# Altium PCB H0ARAx.PcbDoc (part 2 of 2)
Units mil, origin at the board's own origin, x right, y up, seen from the top; angles counter-clockwise.
Board outline 1363.78 x 1181.1 mil, 2 copper layers (Top Layer, Bottom Layer); 43 components, 29 nets, 117 pads, 20 vias.
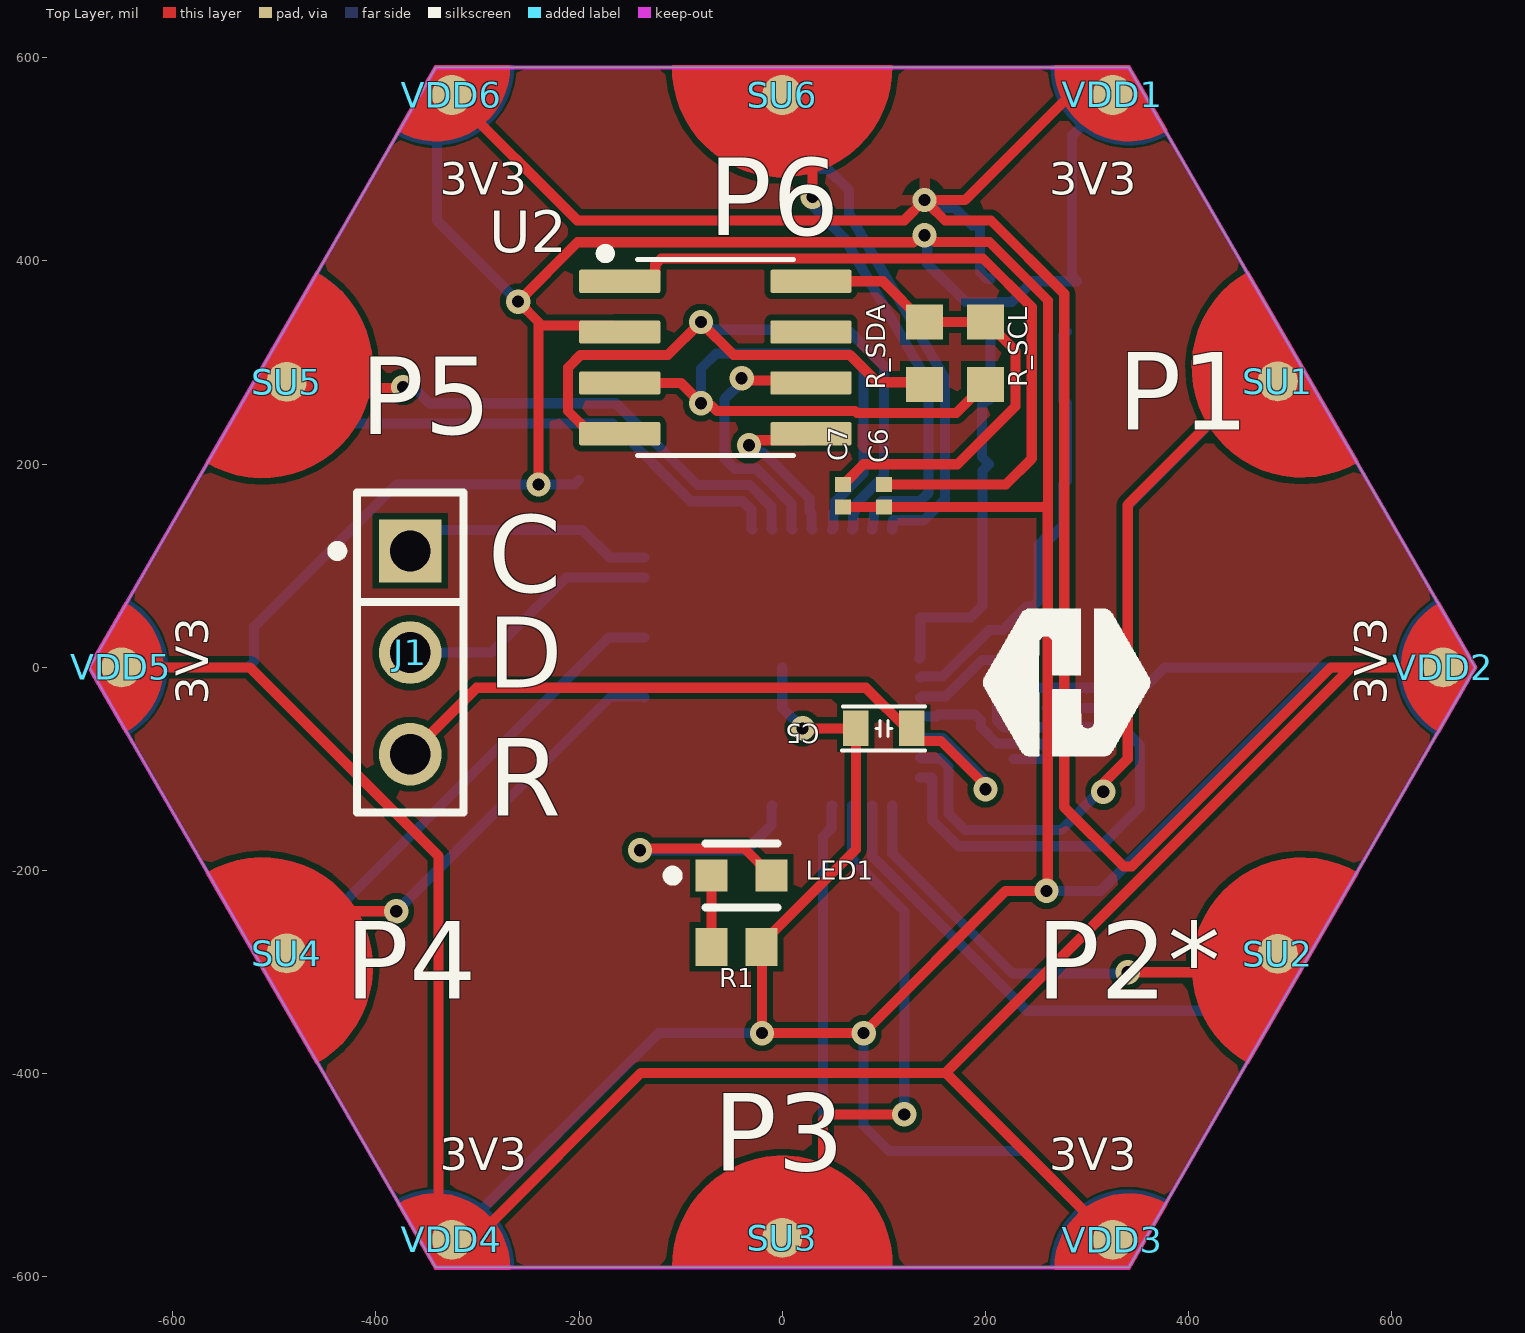
[diagram p0: Top Layer view]

## Via types
v1: diameter 24, hole 12, Top Layer to Bottom Layer, 19 vias
v2: diameter 24, hole 12, Top Layer to Bottom Layer, tented both sides, 1 vias

## Nets (pads, with @x,y where several pads share a name; then routed paths per layer and width w, separated by ;. In a path a pad name is that pad's centre, name@x,y a point inside that pad or via, vN(x,y) a via of type N, cw(c..) or ccw(c..) an arc to the next point about the centre after c; other vN are vias at no path point) (continued)
GND: (continued)
  Bottom Layer w10: GND5.Pwr_D -525.86,0 -520,5.86 -520,40 -380,180 -204.61,180 R2.2 ; GND4.Pwr_D -121.81,-360 v1(-20,-360) ; GND6.Pwr_D -325.2,557.65 -340,542.85 -340,440 v1(-260,360) ; U1.49 0,-40 v2(20,-60) ; v1(80,-360) 80,-450.91 105.09,-476 237.81,-476 GND3.Pwr_D ; v1(140,425.42) 142.68,422.74 142.68,397.32 180.25,359.75 226.05,359.75 246.3,380 290.16,380 285.28,384.88 D1.1 285.28,523.47 GND1.Pwr_D ; v1(260,-220) 313.54,-220 533.54,0 ; X1.P$2 336.77,-40 376.77,0 533.54,0 ; GND2.Pwr_D 533.54,0
NetC6_2: C6.2 U2.1 | length 745.6
  Top Layer w10: U2.1 -131.46,380 -125.04,386.42 -125.04,396.56 -119.18,402.42 197.58,402.42 245.49,354.51 245.49,205.49 220,180 C6.2
NetC7_2: C7.2 R_SCL.2 R_SDA.2 U2.8 | length 485.9
  Top Layer w10: U2.8 98.82,380 138.82,340 201.18,340 229.49,311.69 229.49,257.09 172.41,200 80,200 62.87,182.87 62.87,182.48 60.39,180 C7.2
NetLED1_1: LED1.1 R1.2 | length 70
  Top Layer w10: R1.2 -69.53,-274.92 LED1.1
NetLED1_2: LED1.2 U1.19 | length 300.6
  Top Layer w10: v1(-140,-180) -138.25,-178.25 -37.22,-178.25 LED1.2
  Bottom Layer w10: v1(-140,-180) -35.51,-180 -10.75,-155.24 -10.75,-136.73 U1.19
NetR_SCL_1: R_SCL.1 U1.45 U2.3 | length 761.8
  Top Layer w10: U2.3 -100,280 -77.32,257.32 -69.28,257.32 -64.37,252.42 71.7,252.42 73.66,250.46 171.29,250.46 186.69,265.86 186.69,266.46 198.82,278.58 R_SCL.1
  Bottom Layer w10: v1(-80,260) -80,294.14 -65.14,309 65.14,309 80,294.14 80,191.01 51.99,163 51.99,153.42 50.12,151.54 50.12,136.73 U1.45
NetR_SDA_1: R_SDA.1 U1.46 U2.4 | length 869.4
  Top Layer w10: U2.4 -188.54,230 -210.96,252.42 -210.96,294.97 -198.35,307.58 -112.42,307.58 -80.22,339.78 -48.02,307.58 66.54,307.58 93.43,280.69 137.89,280.69 R_SDA.1
  Bottom Layer w10: v1(-80,340) -76.21,340 -68.56,332.35 64.42,332.35 100,296.77 100,188.38 71.68,160.06 71.68,153.42 69.8,151.54 69.8,136.73 U1.46
NetU1_8: U1.8 X1.P$3 | length 120.2
  Bottom Layer w10: U1.8 135.83,-29.74 136.44,-30.36 138.17,-28.62 160.93,-28.62 196.79,7.24 X1.P$3@240,7.24
NetU1_9: U1.9 X1.P$1 | length 176.8
  Bottom Layer w10: U1.9 136.73,-48.31 151.54,-48.31 153.42,-46.43 189.74,-46.43 195.6,-52.29 195.6,-59.06 211.41,-74.88 254.87,-74.88 X1.P$1@260,-80 ; X1.P$1@227.6,-90.12 257.12,-90.12 X1.P$1
NetU1_43: U1.43 U2.6 | length 266.1
  Top Layer w10: v1(-40,284.58) -37.71,282.29 25.9,282.29 U2.6
  Bottom Layer w10: v1(-40,284.58) -40,280.79 -57,263.79 -57,205.74 -46.82,195.56 -25.5,195.56 -13.94,184 8.94,161.13 8.94,136.73 U1.43
NetU1_44: U1.44 U2.5 | length 178.3
  Top Layer w10: v1(-32.8,218.56) -29.01,218.56 -23.99,223.58 21.77,223.58 U2.5
  Bottom Layer w10: v1(-32.8,218.56) -29.01,218.56 -22.01,211.56 -18.87,211.56 26.75,165.94 26.75,153.42 28.62,151.54 28.62,136.73 U1.44
NRST: C5.2 J1.3 U1.10 | length 725.4
  Top Layer w10: J1.3 -300.73,-20 82.2,-20 124.88,-62.68 C5.2@126.77,-62.68 ; C5.2@127.56,-64.92 135.16,-72.52 156.22,-72.52 200,-116.3 v1(200,-120)
  Bottom Layer w10: U1.10 136.73,-69.8 158.18,-69.8 200,-111.62 v1(200,-120)
UART1_RX: SD4.UART_D U1.32 | length 480.8
  Bottom Layer w10: SD4.UART_D -481.5,-281.5 -170.47,29.53 U1.32
UART1_TX: SU4.UART_U U1.29 | length 457.1
  Top Layer w10: SU4.UART_U -446.3,-240 v1(-380,-240)
  Bottom Layer w10: v1(-380,-240) -168.62,-28.62 -136.73,-28.62 U1.29
UART2_RX: SD2.UART_D U1.14 | length 535.5
  Bottom Layer w10: U1.14 88.58,-185.96 240.52,-337.89 431.8,-337.89 SD2.UART_D
UART2_TX: SU2.UART_U U1.13 | length 483.7
  Top Layer w10: v1(340,-300) 467.26,-300 485.36,-281.89 SU2.UART_U
  Bottom Layer w10: U1.13 108.27,-183.01 226.55,-301.3 338.7,-301.3 v1(340,-300)
UART3_RX: SD6.UART_D U1.48 | length 516.6
  Bottom Layer w10: SD6.UART_D 34.59,498.19 37.98,490.42 44.7,490.42 65.78,469.33 65.78,446.45 158.64,287.06 160,284.73 160,165.32 139.48,144.8 109.17,144.8 U1.48
UART3_TX: SU6.UART_U U1.47 | length 524.8
  Top Layer w10: SU6.UART_U 36.5,526.89 36.5,500.2 29.78,493.48 v1(29.78,463)
  Bottom Layer w10: v1(29.78,463) 29.78,454.42 60.48,423.16 61.36,422.27 144,280.41 144,171.95 135.61,163.56 97.81,163.56 91.36,157.12 89.49,142.76 U1.47
UART4_RX: SD1.UART_D U1.12 | length 1027.5
  Bottom Layer w10: U1.12 146.65,-108.27 147.56,-109.17 147.56,-150.19 173.37,-176 313.39,-176 352,-137.39 352,-76.4 334.14,-58.54 302.29,-58.54 301.96,-58.88 241.5,-58.88 218.04,-58.88 211.6,-52.43 211.6,-30.43 211.6,-25.86 217.46,-20 334.14,-20 340,-14.14 340,159.24 460.51,279.74 486.04,279.74 SD1.UART_D
UART4_TX: SU1.UART_U U1.11 | length 742.6
  Top Layer w10: v1(316,-122.48) 316,-113.91 340,-89.91 340,160 460.12,280.12 486.42,280.12 SU1.UART_U
  Bottom Layer w10: U1.11 136.73,-89.49 155.24,-89.49 163.56,-97.81 163.56,-143.56 180,-160 274.47,-160 311.99,-122.48 v1(316,-122.48)
UART5_RX: SD5.UART_D U1.41 | length 529.5
  Bottom Layer w10: SD5.UART_D -481.5,281.5 -440,240 -166.58,240 -90.14,163.56 -38.75,163.56 -30.43,155.24 -30.43,136.73 U1.41
UART5_TX: SU5.UART_U U1.42 | length 564
  Top Layer w10: SU5.UART_U -466.7,260 -418.2,260 -403.14,275.06 -374.14,275.06 v1(-373.2,276)
  Bottom Layer w10: v1(-373.2,276) -363.35,276 -347.35,260 -163.95,260 -83.51,179.56 -32.12,179.56 -10.75,158.18 -10.75,136.73 U1.42
UART6_RX: SD3.UART_D U1.16 | length 446.1
  Bottom Layer w10: SD3.UART_D 40,-521.5 40,-166.61 48.31,-158.31 48.31,-136.73 U1.16
UART6_TX: SU3.UART_U U1.15 | length 540.2
  Top Layer w10: SU3.UART_U 40,-521.5 40,-445.86 45.86,-440 v1(120,-440)
  Bottom Layer w10: U1.15 68.9,-188.9 120.31,-240.31 120.31,-353.15 120,-353.46 v1(120,-440)
VDD: D1.2 FB1.1 VDD1.Pwr_U VDD2.Pwr_U VDD3.Pwr_U VDD4.Pwr_U VDD5.Pwr_U VDD6.Pwr_U | length 4152.1
  Top Layer w10: VDD5.Pwr_U -524.1,0 -338.24,-185.86 -338.24,-542.85 -325.2,-555.89 VDD4.Pwr_U ; VDD6.Pwr_U -201.81,440 120,440 v1(140,460) v1@145.86,460 ; VDD4.Pwr_U@-321.58,-559.77 -299.77,-559.77 -139.1,-399.1 160.91,-399.1 ; VDD3.Pwr_U 160.91,-399.1 ; VDD1.Pwr_U 283.39,563.39 180,460 v1@145.86,460 ; VDD2.Pwr_U 644.39,0 560,0 ; v1@145.86,460 144.57,458.71 144.57,455.43 160.21,439.79 205.46,439.79 277.49,367.76 277.49,-137.49 335.86,-195.86 344.14,-195.86 540,0 560,0 ; 160.91,-399.1 560,0
  Bottom Layer w10: v1(140,460) 147.65,452.35 169.5,452.35 186.85,435 D1.2 194.72,389.37 201.54,382.56 FB1.1
VDDA: C1.2 C2.1 C3.2 C4.2 FB1.2 U1.4 U1.5 U1.6 | length 386
  Bottom Layer w10: U1.6 134.88,8.9 134.63,8.9 135.83,10.1 U1.5 U1.4 135.74,49.13 185.53,49.13 197.07,60.67 C1.2 197.07,193.57 C2.1 196.5,207 196.5,258 C4.2 ; C4.2@203.5,263.5 205,265 FB1.2
VSSA: C1.1 C2.2 C3.1 C4.1 R3.2 U1.7 | length 424.8
  Bottom Layer w10: U1.7 136.73,-8.94 157.99,-8.94 203.61,36.69 216.69,36.69 240,60 246.59,60 C1.1 C3.1 ; C3.1@252.19,120.52 259.79,128.11 264.71,128.11 276.5,139.91 276.5,180 280,183.5 280,260 276.5,263.5 C4.1 276.5,326.89 R3.2
pads on no net: U1.1 U1.2 U1.3 U1.17 U1.18 U1.20 U1.21 U1.22 U1.23 U1.24 U1.25 U1.26 U1.27 U1.28 U1.30 U1.31 U1.33 U1.34 U1.37 U1.38 U1.39 U1.40 U2.7

## Polygon pours and split planes (outlines as drawn)
VDD on Top Layer "VDD" (solid, pour order 3): -340.94,600 340.94,600 700,0 580,-200 340,-600 -340.94,-600 -681.89,0
GND on Bottom Layer "GND" (solid, pour order 4): -340.94,600 340.94,600 681.89,0 340.94,-600 -340.94,-600 -580,-200 -699.53,0

## Keep-outs
Keep-Out Layer:
  the board outline again, w3.94

## Silkscreen, mask and mechanical layers (free items; w line width, h text height)
Top Overlay:
  drawing of 1337 lines, arcs and shapes, not listed
  text "3V3" at -337,465.01 h32
  text "3V3" at 263,465.01 h32
  text "P6" at -73.11,425.36 h76
  text "P1" at 330,234.02 h76
  text "P5" at -415.23,229.56 h76
  text "C" at -290,74.02 h76
  text "D" at -290,-19.99 h70
  text "3V3" at -565.01,-37 h32 r90
  text "3V3" at 594.99,-37 h32 r90
  text "R" at -290,-145.98 h76
  text "P4" at -430,-325.98 h76
  text "P2*" at 250,-325.98 h76
  text "3V3" at -337,-494.99 h32
  text "P3" at -68.14,-495.44 h76
  text "3V3" at 263,-494.99 h32
Bottom Overlay:
  text "GND" at 257,525.01 h32
  text "GND" at -253.7,455.18 h32
  text "P6" at 66.89,425.36 h76
  text "P5" at -310,234.02 h76
  text "P1" at 410,234.02 h76
  text "H01R00" at 490,190 h70 r90
  text "GND" at -565.01,57 h32 r90
  text "GND" at 594.99,37 h32 r90
  text "P4" at -270,-325.98 h76
  text "P2*" at 390,-325.98 h76
  text "GND" at -337,-465.01 h32 r180
  text "GND" at 263,-465.01 h32 r180
  text "P3" at 71.86,-495.44 h76
Top Solder:
  drawing of 20 lines, arcs and shapes, not listed
Dimensions:
  the board outline again, w3.94

## Text inside footprints (layer, text, board x,y; h text height)
C2: Mechanical 32 "1" at 193.5,200 h25 r180; Mechanical 32 "2" at 266.5,200 h25 r180; Mechanical 33 "C40" at 313.5,207.17 h25 r180
C4: Mechanical 32 "1" at 286.5,265 h25; Mechanical 32 "2" at 213.5,265 h25; Mechanical 33 "C40" at 166.5,257.83 h25